# Altium PCB YarnControl_Driver_v1.0.PcbDoc
Units mm, origin at the board's own origin, x right, y up, seen from the top; angles counter-clockwise.
Board outline 80 x 35 mm, 2 copper layers (Top Layer, Bottom Layer); 81 components, 64 nets, 282 pads, 0 vias.
Unrouted connection lines stored in the file: 179.
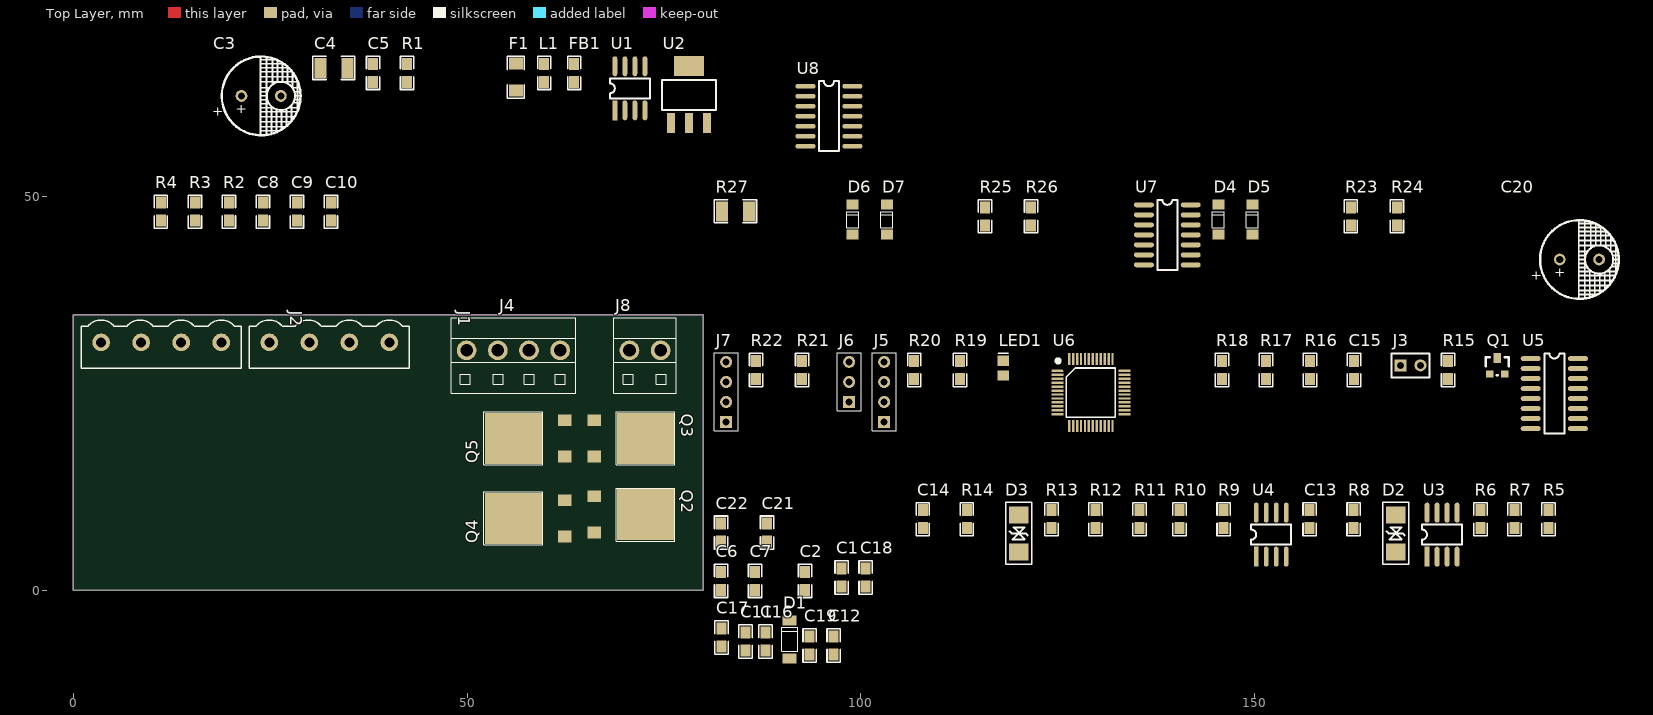
[diagram p0: Top Layer view]
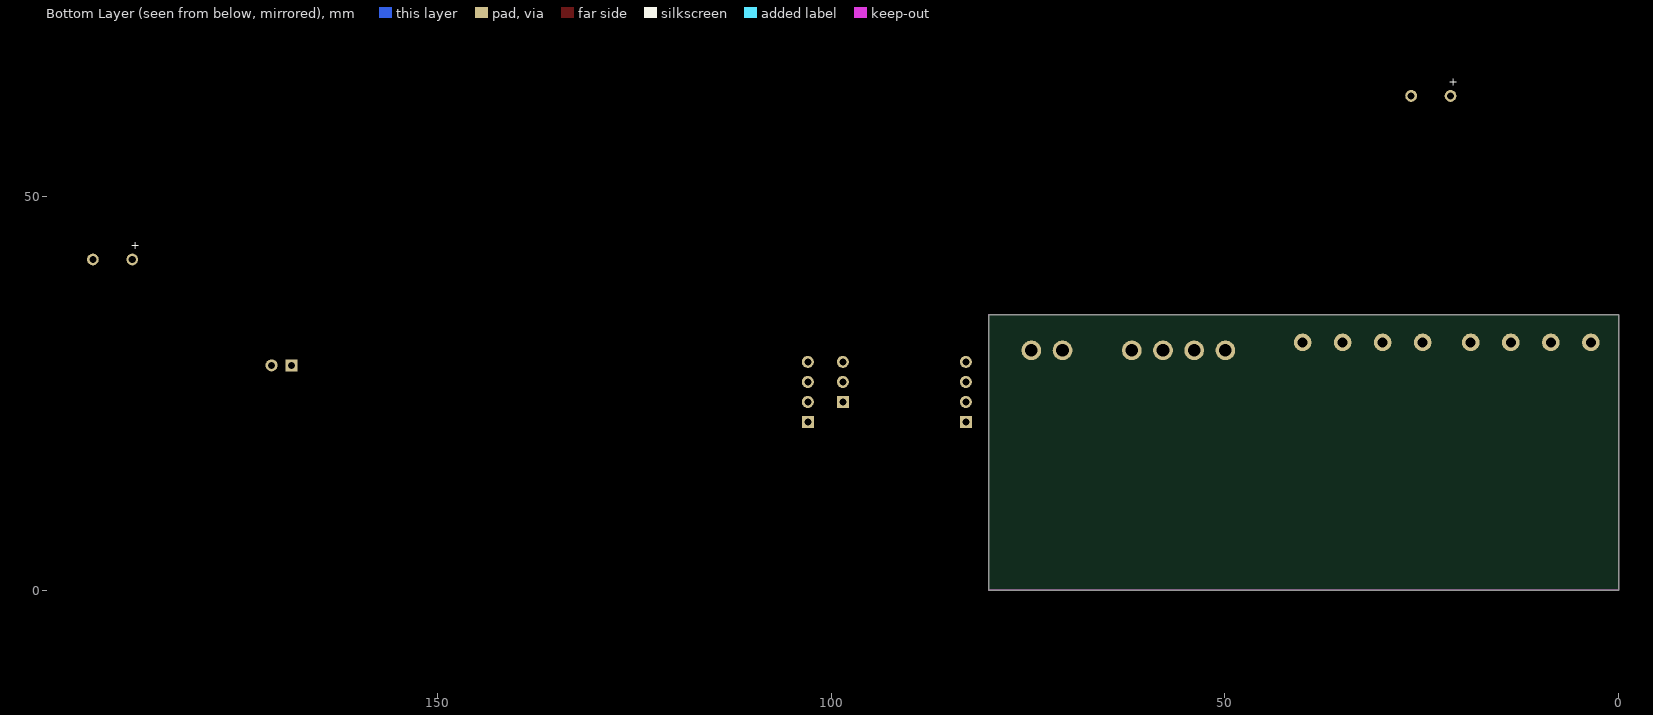
[diagram p1: Bottom Layer view, seen from below]

## Layer stack, top to bottom
Top Layer: signal copper 0.0356
Dielectric: dielectric 0.32, FR-4, Dk 4.8
Bottom Layer: signal copper 0.0356

## Board outline
0,0 80,0 80,35 0,35

## Design rules (kind name [scope] priority, off if disabled: settings)
Clearance [All] p1: gap=0.254
PolygonConnect [All] p1: connectstyle=Relief reliefconductorwidth=0.254 reliefentries=4 polygonreliefangle="90 Angle"
RoutingVias [All] p1: holewidth=0.711 width=1.27 viastyle="Through Hole" minholewidth=0.711 minwidth=1.27 maxholewidth=0.711 maxwidth=1.27
SilkscreenOverComponentPads [All] p1: minsilkscreentomaskgap=0.254
SolderMaskExpansion [All] p1: expansion=0.102
Width [All] p1: maxlimit=0.254 minlimit=0.254 preferedwidth=0.254
27 further rules are at their usual default settings.

## Classes and differential pairs
component class YarnControl_motor_v1.0: C20 C21 C22 D4 D5 D6 D7 J8 Q2 Q3 Q4 Q5 R23 R24 R25 R26 R27 U7 U8
component class YarnControl_Driver_v1.0: C1 C2 C3 C4 C5 C6 C7 C8 C9 C10 C11 C12 C13 C14 C15 C16 C17 C18 C19 D1 D2 D3 F1 FB1 J1 J2 J3 J4 J5 J6 J7 L1 LED1 Q1 R1 R2 R3 R4 R5 R6 R7 R8 R9 R10 R11 R12 R13 R14 R15 R16 R17 R18 R19 R20 R21 R22 U1 U2 U3 U4 U5 U6

## Components (designator, comment, footprint, x,y, rotation, side; value= is the part's Value field where it differs from the comment)
C1 "0.1uF" 0805 97.536,0.508 r90 top
C2 "22uF" 0805 92.913,0.076 r90 top
C3 "220uF" CAP-5mm 21.361,62.776 r0 top
C4 "47uF" 1210 31.369,66.332 r0 top
C5 "0.1uF" 0805 38.075,64.554 r90 top
C6 "10uF" 0805 82.245,0.076 r90 top
C7 "0.1uF" 0805 86.563,0.076 r90 top
C8 "10uF" 0805 24.079,46.939 r90 top
C9 "0.1uF" 0805 28.397,46.939 r90 top
C10 "0.1uF" 0805 32.715,46.939 r90 top
C11 "150pF" 0805 85.344,-7.62 r90 top
C12 "NS" 0805 96.52,-8.128 r90 top
C13 "0.1uF" 0805 156.947,7.899 r90 top
C14 "1uF" 0805 107.848,7.899 r90 top
C15 "0.1uF" 0805 162.585,26.848 r90 top
C16 "1uF" 0805 87.884,-7.62 r90 top
C17 "1uF" 0805 82.296,-7.112 r90 top
C18 "0.1uF" 0805 100.584,0.508 r90 top
C19 "0.1uF" 0805 93.472,-8.128 r90 top
C20 "100uF/50V" CAP-5mm 188.697,42.012 r0 top
C21 "0.1uF" 0805 88.087,6.198 r90 top
C22 "0.1uF" 0805 82.245,6.198 r90 top
D1 "1N5819" Diode_TP2 90.932,-8.636 r90 top
D2 "SMBJ6.5CA" SMBJ_DO-214 167.869,7.239 r90 top
D3 "SMBJ6.5CA" SMBJ_DO-214 120.015,7.239 r90 top
D4 "1N4148" DIDODE_LL-34 145.364,47.066 r90 top
D5 "1N4148" DIDODE_LL-34 149.682,47.066 r90 top
D6 "1N4148" DIDODE_LL-34 98.933,47.066 r90 top
D7 "1N4148" DIDODE_LL-34 103.276,47.066 r90 top
F1 "FUSE" 1206 56.185,63.436 r90 top
FB1 "FERRITE" 0805 63.602,64.554 r90 top
J1 "SH-4" J5.08_4(NoEar) 32.512,31.496 r0 top
J2 "SH-4" J5.08_4(NoEar) 11.176,31.496 r0 top
J3 "Jumper" J254-2 168.478,28.575 r0 top
J4 "SH-4" CH3.96-4P 55.88,30.48 r0 top
J5 "SH-4" J254-4 102.946,21.387 r90 top
J6 "SH-3" J2.54-3 98.501,26.467 r90 top
J7 "SH-4" J254-4 82.88,21.387 r90 top
J8 "SH-2" CH3.96-2P 70.612,30.48 r0 top
L1 "4.7uH" 0805 59.792,64.554 r90 top
LED1 "GREEN" LED 118.059,28.219 r90 top
Q1 "S8550" 901X_SOT-23 180.772,29.489 r0 top
Q2 "NCE40P70K" TO-252 72.644,9.652 r270 top
Q3 "NCE40P70K" TO-252 72.644,19.304 r270 top
Q4 "NCE6075" TO-252 55.88,9.144 r90 top
Q5 "NCE6075" TO-252 55.88,19.304 r90 top
R1 "100K" 0805 42.393,64.554 r90 top
R2 "210K" 0805 19.761,46.939 r90 top
R3 "40.2K" 0805 15.443,46.939 r90 top
R4 "100K" 0805 11.125,46.939 r90 top
R5 "100K" 0805 187.274,7.899 r90 top
R6 "22R" 0805 178.638,7.899 r90 top
R7 "22R" 0805 182.956,7.899 r90 top
R8 "680R" 0805 162.535,7.899 r90 top
R9 "22R" 0805 146.025,7.899 r90 top
R10 "120R" 0805 140.437,7.899 r90 top
R11 "22R" 0805 135.357,7.899 r90 top
R12 "22R" 0805 129.769,7.899 r90 top
R13 "680R" 0805 124.181,7.899 r90 top
R14 "4.7K" 0805 113.436,7.899 r90 top
R15 "10K" 0805 174.523,26.848 r90 top
R16 "10K" 0805 156.997,26.848 r90 top
R17 "20K" 0805 151.409,26.848 r90 top
R18 "8.2K" 0805 145.821,26.848 r90 top
R19 "1K" 0805 112.573,26.848 r90 top
R20 "1K" 0805 106.756,26.848 r90 top
R21 "1K" 0805 92.532,26.848 r90 top
R22 "10K" 0805 86.69,26.848 r90 top
R23 "1K" 0805 162.179,46.355 r90 top
R24 "1K" 0805 168.021,46.355 r90 top
R25 "1K" 0805 115.748,46.355 r90 top
R26 "1K" 0805 121.59,46.355 r90 top
R27 "10R" 1210 82.347,48.133 r0 top
U1 "MP1584" SO-8 70.663,63.741 r90 top
U2 "AMS1117" TO-223 78.156,62.928 r0 top
U3 "SMEC98SP" SO-8 173.761,7.087 r90 top
U4 "SP3485" SO-8 152.07,7.087 r90 top
U5 "HX711" SO-16 185.014,29.439 r0 top
U6 "STM32F103C8T6" LQFP_48 129.184,25.121 r0 top
U7 "74HC08" SO-14 135.915,48.946 r0 top
U8 "CD4069" SO-14 92.964,64.008 r0 top

## Footprints (in the part's own frame and the unit in brackets; to place one, negate y for a bottom-side part, rotate by r counter-clockwise, add the part's x,y. Pads: shape width x height; smd on the part's side, far side on the other; paste and mask are expansions set on the pad)
0805 [mil]
  rect 60x50 smd: 1(0,0) 2(90,0)
  silkscreen extent -38,-33 128,33
901X_SOT-23 [mil]
  rect 36x50 smd: 1(0,0)
  rect 36x36 smd: 2(-38,-80) 3(37,-80)
  silkscreen extent -58,-85 57,5
1206 [mil]
  rect 60x70 smd: 1(0,0) 2(135,0)
  silkscreen extent -38,-42 173,42
1210 [mil]
  rect 60x100 smd: 1(0,0) 2(135,0)
  silkscreen extent -38,-58 173,58
CAP-5mm [mm]
  round 1.5 hole 0.9: 1(0,0) 2(5,0)
  silkscreen extent -2.5,-5 7.5,5
CH3.96-2P [mm]
  round 2.5 hole 1.6: 1(0,0) 2(3.96,0)
  silkscreen extent -1.98,-5.45 5.94,4.15
CH3.96-4P [mm]
  round 2.5 hole 1.6: 1(-5.94,0) 2(-1.98,0) 3(1.98,0) 4(5.94,0)
  silkscreen extent -7.92,-5.45 7.92,4.15
DIDODE_LL-34 [mil]
  rect 50x60 smd: 1(-75,0) 2(75,0)
  silkscreen extent -40,-30 40,30
Diode_TP2 [mil]
  rect 50x70 smd: 1(0,0) 2(190,0)
  silkscreen extent 35,-40 155,40
J2.54-3 [mil]
  rect 60x60 hole 35: 1(-100,0)
  round 60 hole 35: 2(0,0) 3(100,0)
  silkscreen extent -145,-60 145,60
J5.08_4(NoEar) [mil]
  round 88 hole 50: 1(300,0) 2(100,0) 3(-100,0) 4(-300,0)
  silkscreen extent -400,-130 400,111
J254-2 [mil]
  rect 60x60 hole 35: 1(0,0)
  round 60 hole 35: 2(100,0)
  silkscreen extent -45,-60 145,60
J254-4 [mil]
  rect 60x60 hole 35: 1(0,0)
  round 60 hole 35: 2(100,0) 3(200,0) 4(300,0)
  silkscreen extent -45,-60 345,60
LED [mm]
  rect 1.3x1.5 smd: 1(-0.95,0) 2(0.95,0)
  silkscreen extent 1.9,-0.65 1.9,0.65
LQFP_48 [mm]
  oval 1.5x0.3 smd: 1(-4.25,2.75)
  rect 1.5x0.3 smd: 2(-4.25,2.25) 3(-4.25,1.75) 4(-4.25,1.25) 5(-4.25,0.75) 6(-4.25,0.25) 7(-4.25,-0.25) 8(-4.25,-0.75) 9(-4.25,-1.25) 10(-4.25,-1.75) 11(-4.25,-2.25) 12(-4.25,-2.75) 25(4.25,-2.75) 26(4.25,-2.25) 27(4.25,-1.75) 28(4.25,-1.25) 29(4.25,-0.75) 30(4.25,-0.25) 31(4.25,0.25) 32(4.25,0.75) 33(4.25,1.25) 34(4.25,1.75) 35(4.25,2.25) 36(4.25,2.75)
  rect 0.3x1.5 smd: 13(-2.75,-4.25) 14(-2.25,-4.25) 15(-1.75,-4.25) 16(-1.25,-4.25) 17(-0.75,-4.25) 18(-0.25,-4.25) 19(0.25,-4.25) 20(0.75,-4.25) 21(1.25,-4.25) 22(1.75,-4.25) 23(2.25,-4.25) 24(2.75,-4.25) 37(2.75,4.25) 38(2.25,4.25) 39(1.75,4.25) 40(1.25,4.25) 41(0.75,4.25) 42(0.25,4.25) 43(-0.25,4.25) 44(-0.75,4.25) 45(-1.25,4.25) 46(-1.75,4.25) 47(-2.25,4.25) 48(-2.75,4.25)
  silkscreen extent -4.33,-3.11 3.11,4.18, body extent -4.5,-4.5 4.5,4.5, height 1.6
SMBJ_DO-214 [mm]
  rect 2.16x2.5 smd: 1(-2.35,0) 2(2.35,0)
  silkscreen extent -3.94,-1.65 3.94,1.65, body extent -2.8,-1.95 2.8,1.95, height 2.5
SO-8 [mil]
  rect 100x24 smd: 1(-110,75)
  oval 100x24 smd: 2(-110,25) 3(-110,-25) 4(-110,-75) 5(110,-75) 6(110,-25) 7(110,25) 8(110,75)
  silkscreen extent -50,-100 50,100
SO-14 [mil]
  oval 100x24 smd: 1(0,0) 2(0,-50) 3(0,-100) 4(0,-150) 5(0,-200) 6(0,-250) 7(0,-300) 8(234,-300) 9(234,-250) 10(234,-200) 11(234,-150) 12(234,-100) 13(234,-50) 14(234,0)
  silkscreen extent 67,-325 167,25
SO-16 [mil]
  oval 100x24 smd: 1(0,0) 2(0,-50) 3(0,-100) 4(0,-150) 5(0,-200) 6(0,-250) 7(0,-300) 8(0,-350) 9(236,-350) 10(236,-300) 11(236,-250) 12(236,-200) 13(236,-150) 14(236,-100) 15(236,-50) 16(236,0)
  silkscreen extent 68,-375 168,25
TO-223 [mil]
  rect 150x100 smd: 0(0,142.5)
  rect 40x100 smd: 1(-90,-142.5) 2(0,-142.5) 3(90,-142.5)
  silkscreen extent -135,-78 135,72
TO-252 [mm]
  rect 6.5x7.2 smd: 1(0,0)
  rect 1.5x1.7 smd: 2(-2.3,-6.5) 3(2.3,-6.5)
  silkscreen extent -3.35,-3.73 3.38,3.73

## Part data
C1 C2 C6 C7 C11 C12 C14 C16 C17 C18 C19 C21 C22: library part CAP, "电容"
C3: library part "Cap Pol1", "电解电容"
C4 C5 C8 C9 C10: library part Cap0805
C13 C15: library part Cap, "Capacitor"
C20: library part "Cap Pol1", "Polarized Capacitor (Radial)"
D1: library part Diode, "二极管"
D2 D3: library part TVS
D4 D5 D6 D7: library part Diode, "Default Diode"
F1: "保险丝"
L1: library part Inductor, "电感"
LED1: library part LED2, "Typical RED, GREEN, YELLOW, AMBER GaAs LED"
Q1: library part PNP
Q2 Q3: library part MOSFET-P, "P-Channel MOSFET"
Q4 Q5: library part MOSFET-N, "N-Channel MOSFET"
R1 R2 R3 R4 R5 R16 R17 R18 R19 R20 R21 R23 R24 R25 R26 R27: library part RES, "电阻"
R6 R7 R8 R9 R10 R11 R12 R13 R14 R15 R22: library part Res2, "Resistor"
U4: "485"

## Nets (pads, with @x,y where several pads share a name; then routed paths per layer and width w, separated by ;. In a path a pad name is that pad's centre, name@x,y a point inside that pad or via, vN(x,y) a via of type N, cw(c..) or ccw(c..) an arc to the next point about the centre after c; other vN are vias at no path point)
485_DE: R11.1
485_RX: R9.1 U6.13
485_TX: R12.1 U6.12
+3.3V: C21.1 C22.1 FB1.2 J3.2 J5.1 J7.1 R6.2 R7.2 R15.2 R19.2 U3.8 U6.1 U6.9 U6.24 U6.36 U6.48 U7.14 U8.14
+5V: C2.2 C4.2 C5.2 C14.2 L1.2 Q1.3 R2.1 U2.3 U5.1 U5.16
+24V: C3.1 C20.1 D4.2 D5.2 F1.1 J1.1 J2.1 Q2.1 Q3.3
BOOT0: J3.1 R16.1 U6.44
BOOT1: R22.2 U6.20
BT_RXD: J7.4 U6.22
BT_TXD: J7.3 U6.21
ENA: U7.1 U7.4 U7.9 U7.12
GND: C2.1 C3.2 C4.1 C5.1 C6.2 C7.2 C8.1 C9.1 C10.1 C12.2 C13.1 C14.1 C15.1 C20.2 C21.2 C22.2 D1.1 D2.2 D3.1 J1.2 J2.2 J5.4 J6.3 J7.2 R3.1 R4.1 R5.1 R8.1 R14.1 R16.2 R22.1 R27.1 U1.5 U2.1 U3.4 U4.5 U5.14 U5.15 U6.8 U6.23 U6.35 U6.47 U7.7 U8.7
IIC1_SCL: R6.1 U3.6 U6.42
IIC1_SDA: R7.1 U3.5 U6.43
IN1: U7.2 U8.1
IN1-: U7.10 U8.2
IN2: U7.5 U8.3
IN2-: U7.13 U8.4
LED: LED1.2
MOTOR_1: D4.1 D6.2 J8.1 Q3.1 Q5.1
MOTOR_2: D5.1 D7.2 J8.2 Q2.3 Q4.1
NetC1_1: C1.1 U1.8
NetC1_2: C1.2 D1.2 L1.1 U1.1
NetC6_1: C6.1 C7.1 F1.2 R1.2 U1.7
NetC8_2: C8.2 C9.2 C10.2 FB1.1 U2.0 U2.2
NetC11_1: C11.1 C12.1 U1.3
NetC11_2: C11.2 R5.2
NetC18_2: C18.2 R20.1 U5.8
NetC19_2: C19.2 R21.1 U5.10
NetD6_1: D6.1 D7.1 Q4.3 Q5.3 R27.2
NetLED1_1: LED1.1 R19.1
NetQ1_2: Q1.2 U5.2
NetQ2_2: Q2.2 R24.1
NetQ3_2: Q3.2 R23.2
NetQ4_2: Q4.2 R26.1
NetQ5_2: Q5.2 R25.2
NetR1_1: R1.1 U1.2
NetR2_2: R2.2 R3.2 U1.4
NetR4_2: R4.2 U1.6
NetR9_2: R9.2 U4.1
NetR11_2: R11.2 R14.2 U4.2 U4.3
NetR12_2: R12.2 U4.4
NetR17_1: R17.1 R18.1 U5.4
NRST: C15.2 R15.1 U6.7
RS485_A: D2.1 J1.3 J2.3 R8.2 R10.1 U4.7
RS485_B: D3.2 J1.4 J2.4 R10.2 R13.1 U4.6
SENSOR_A+: J4.4 R20.2
SENSOR_A-: C18.1 J4.3 U5.7
SENSOR_B+: R21.2
SENSOR_B-: C19.1 U5.9
SENSOR_DOUT: U5.12
SENSOR_E+: C16.2 J4.1 Q1.1 R17.2 U5.3
SENSOR_E-: C16.1 C17.2 J4.2 R18.2 U5.5
SENSOR_SCK: U5.11
SWCLK: J5.3 U6.37
SWDIO: J5.2 U6.34
SWITCH_1: R23.1 U7.3
SWITCH_2: R25.1 U7.8
SWITCH_3: R24.2 U7.6
SWITCH_4: R26.2 U7.11
UART1_RX: J6.1 U6.31
UART1_TX: J6.2 U6.30
VBG: C17.1 U5.6
VCC: C13.2 R13.2 U4.8
pads on no net: U3.1 U3.2 U3.3 U3.7 U5.13 U6.2 U6.3 U6.4 U6.5 U6.6 U6.10 U6.11 U6.14 U6.15 U6.16 U6.17 U6.18 U6.19 U6.25 U6.26 U6.27 U6.28 U6.29 U6.32 U6.33 U6.38 U6.39 U6.40 U6.41 U6.45 U6.46 U8.5 U8.6 U8.8 U8.9 U8.10 U8.11 U8.12 U8.13

## Keep-outs
Keep-Out Layer:
  the board outline again, w0.127

## Dimensions
0,0 to 80,0 on Top Overlay
0,0 to 0,35 on Top Overlay

## Text inside footprints (layer, text, board x,y; h text height)
C3: Top Overlay "+" at 20.65,60.566 h1.27; Top Overlay "+" at 17.678,60.236 h1.27; Bottom Overlay "+" at 21.572,64.078 h1.02
C20: Top Overlay "+" at 187.985,39.802 h1.27; Top Overlay "+" at 185.014,39.472 h1.27; Bottom Overlay "+" at 188.908,43.314 h1.02